# EAGLE board Copy of DCS Project Final (EAGLE 9.7.0)

Size 443.7 x 245.09 mm. Coordinates in mm from the lower left corner, seen from the top.
Outline: 0,0 443.7,0 443.7,245.09 0,245.09 0,0
Copper layers (1*16): Top 0.035mm / dielectric 1.5mm / Bottom 0.035mm
Design rules "default": minimum track width 6mil, minimum drill 0.35mm, track to track 6mil, track to pad 6mil, pad to pad 6mil, via to via 6mil, smd to smd 6mil, copper to edge 40mil, drill to drill 6mil, minimum pad ring 10mil, minimum via ring 8mil, stop-mask expansion 4mil, vias tented up to drill 0mil, thermal gap 10mil

## Footprints (pad centres in the part's own frame; a part is rotated, then mirrored left to right if it is on the bottom)
7SEG-13 = drill 0.813 long: 1 -5.08,-7.62; 2 -2.54,-7.62; 3 0,-7.62; 4 2.54,-7.62; 5 5.08,-7.62; 6 5.08,7.62; 7 2.54,7.62; 8 0,7.62; 9 -2.54,7.62; 10 -5.08,7.62
BATTERY-GENERIC = drill 1.118 pad 3.15 octagon: + 2.54,0; - -2.54,0
PIEZO = drill 1 pad 1.6: 1 -3.5,0; 2 3.5,0
RESAD1016W63L850D250B = drill 0.83 pad 1.43: 1 -5.08,0; 2 5.08,0
78F01T = drill 0.8: 1 -1.27,-3.81; 2 1.27,-3.81; 3 1.27,3.81; 4 -1.27,3.81
DIP762W53P254L1969H508Q14B = drill 0.743 pad 1.343: 1 -3.81,7.62; 2 -3.81,5.08; 3 -3.81,2.54; 4 -3.81,0; 5 -3.81,-2.54; 6 -3.81,-5.08; 7 -3.81,-7.62; 8 3.81,-7.62; 9 3.81,-5.08; 10 3.81,-2.54; 11 3.81,0; 12 3.81,2.54; 13 3.81,5.08; 14 3.81,7.62
DIP762W53P254L1969H508Q16B = drill 0.743 pad 1.343: 1 -3.81,8.89; 2 -3.81,6.35; 3 -3.81,3.81; 4 -3.81,1.27; 5 -3.81,-1.27; 6 -3.81,-3.81; 7 -3.81,-6.35; 8 -3.81,-8.89; 9 3.81,-8.89; 10 3.81,-6.35; 11 3.81,-3.81; 12 3.81,-1.27; 13 3.81,1.27; 14 3.81,3.81; 15 3.81,6.35; 16 3.81,8.89

## Placement (x,y rotation side)
DIGIT2  7SEG-CK  [7SEG-13]  226.55,14.1 0 top
FUNC1  FUNCTION-GENERATOR  [BATTERY-GENERIC]  263.32,132.14 180 top
FUNC3  FUNCTION-GENERATOR  [BATTERY-GENERIC]  58.27,228.66 180 top
FUNC4  FUNCTION-GENERATOR  [BATTERY-GENERIC]  108.98,229.36 180 top
FUNC5  FUNCTION-GENERATOR  [BATTERY-GENERIC]  8.26,198.1 180 top
FUNC6  FUNCTION-GENERATOR  [BATTERY-GENERIC]  8.49,165.22 180 top
FUNC7  FUNCTION-GENERATOR  [BATTERY-GENERIC]  348.62,229.59 180 top
FUNC8  FUNCTION-GENERATOR  [BATTERY-GENERIC]  401.18,230.28 180 top
FUNC9  FUNCTION-GENERATOR  [BATTERY-GENERIC]  435.45,195.32 180 top
FUNC10  FUNCTION-GENERATOR  [BATTERY-GENERIC]  435.45,161.28 180 top
P1  BATTERYGENERIC  [BATTERY-GENERIC]  219.44,137.55 180 top
PIEZO1  PIEZO  [PIEZO]  227.32,231.51 0 top
R1  1k  [RESAD1016W63L850D250B]  364.56,98.22 90 top
R2  1k  [RESAD1016W63L850D250B]  369.64,98.22 90 top
R3  1k  [RESAD1016W63L850D250B]  374.72,98.22 90 top
R4  1k  [RESAD1016W63L850D250B]  359.48,98.22 90 top
R8  1k  [RESAD1016W63L850D250B]  233.67,226.43 90 top
R16  1k  [RESAD1016W63L850D250B]  218.62,40.98 90 top
R17  1k  [RESAD1016W63L850D250B]  221.16,40.98 90 top
R18  1k  [RESAD1016W63L850D250B]  223.7,40.98 90 top
R19  1k  [RESAD1016W63L850D250B]  226.24,40.98 90 top
R20  1k  [RESAD1016W63L850D250B]  228.78,40.98 90 top
R21  1k  [RESAD1016W63L850D250B]  231.32,40.98 90 top
R22  1k  [RESAD1016W63L850D250B]  233.86,40.98 90 top
SW1  DPST78F01T  [78F01T]  245.1,197.22 0 top
U1  74HC73_PDIP  [DIP762W53P254L1969H508Q14B]  301.06,99.49 90 top
U2  74HC73_PDIP  [DIP762W53P254L1969H508Q14B]  323.92,99.49 90 top
U3  74HC08_PDIP  [DIP762W53P254L1969H508Q14B]  275.66,99.49 90 top
U4  74HC04_PDIP  [DIP762W53P254L1969H508Q14B]  255.34,99.49 90 top
U10  CD4511_PDIP  [DIP762W53P254L1969H508Q16B]  227.51,52.41 270 top
U12  74HC74_PDIP  [DIP762W53P254L1969H508Q14B]  157.47,197.22 90 top
U13  74HC74_PDIP  [DIP762W53P254L1969H508Q14B]  177.79,197.22 90 top
U14  74HC74_PDIP  [DIP762W53P254L1969H508Q14B]  198.11,197.22 90 top
U15  74HC74_PDIP  [DIP762W53P254L1969H508Q14B]  218.43,197.22 90 top
U16  74HC08_PDIP  [DIP762W53P254L1969H508Q14B]  54.25,198.68 90 top
U17  74HC32_PDIP  [DIP762W53P254L1969H508Q14B]  74.57,198.68 90 top
U18  74HC08_PDIP  [DIP762W53P254L1969H508Q14B]  343.54,197.8 90 top
U19  74HC32_PDIP  [DIP762W53P254L1969H508Q14B]  363.86,197.8 90 top

## Library data of the parts
DIGIT2 = Tinkercad; CATEGORY: Opto-Electronic; SUB-CATEGORY: Display; TYPE: 7-Segment
FUNC1 FUNC3-FUNC10 P1 PIEZO1 R1-R4 R8 R16-R22 SW1 U1-U4 U10 U12-U19 = Tinkercad

## Nets
DIGIT2_A: DIGIT2.7 R20.1
DIGIT2_B: DIGIT2.6 R19.1
DIGIT2_C: DIGIT2.4 R18.1
DIGIT2_D: DIGIT2.2 R17.1
DIGIT2_E: DIGIT2.1 R16.1
DIGIT2_F: DIGIT2.9 R22.1
DIGIT2_G: DIGIT2.10 R21.1
FUNC1+: FUNC1.+ U1.1 U12.3 U12.11 U13.3 U13.11 U14.3 U14.11 U15.3 U15.11
FUNC3+: FUNC3.+ U16.12
FUNC4+: FUNC4.+ U16.9
FUNC5+: FUNC5.+ U16.4
FUNC6+: FUNC6.+ U16.1
FUNC7+: FUNC7.+ U18.12
FUNC8+: FUNC8.+ U18.9
FUNC9+: FUNC9.+ U18.4
FUNC10+: FUNC10.+ U18.1
FUNC10-: DIGIT2.8 FUNC1.- FUNC3.- FUNC4.- FUNC5.- FUNC6.- FUNC7.- FUNC8.- FUNC9.- FUNC10.- P1.- R8.1 U1.11 U2.11 U3.7 U4.7 U10.5 U10.8 U12.7 U13.7 U14.7 U15.7 U16.7 U17.7 U18.7 U19.7
P1+: P1.+ SW1.1 SW1.2 U1.3 U1.4 U1.7 U1.10 U1.14 U2.3 U2.4 U2.7 U2.10 U2.14 U3.12 U3.14 U4.14 U10.3 U10.4 U10.16 U12.1 U12.10 U12.14 U13.4 U13.10 U13.14 U14.4 U14.10 U14.14 U15.4 U15.10 U15.14 U16.14 U17.14 U18.14 U19.14
PIEZO1_2: PIEZO1.2 R8.2
U1_2Q: R2.2 U1.9 U2.1 U3.2 U10.1
U2_R1: U1.2 U1.6 U2.2 U2.6 U3.11 U4.9
U3_1Y: U3.3 U3.4
U3_3A: U3.6 U3.9
U3_3Y: U3.8 U4.11
U4_1Y: U3.5 U4.2
U4_5Y: U3.13 U4.10
U4_6Y: U3.10 U4.12
U10_A: R20.2 U10.13
U10_B: R19.2 U10.12
U10_C: R18.2 U10.11
U10_D: R17.2 U10.10
U10_E: R16.2 U10.9
U10_F: R22.2 U10.15
U10_G: R21.2 U10.14
U10_IA: R3.2 U1.5 U1.12 U4.13 U10.7
U10_IC: R1.2 U2.5 U2.12 U4.1 U10.2
U10_ID: R4.2 U2.9 U3.1 U10.6
U12_1Q: U12.5 U12.12 U16.2
U12_2Q: U12.9 U13.2 U16.5
U12_CLR2: SW1.4 U12.13 U13.13 U14.13 U15.13
U13_2Q: U13.9 U14.2 U16.13
U14_1Q: U14.5 U14.12 U18.2
U14_2Q: U14.9 U15.2 U18.5
U15_1Q: U15.5 U15.12 U18.13
U15_2Q: U12.2 U15.9 U18.10
U15_CLR1: SW1.3 U12.4 U13.1 U14.1 U15.1
U16_1Y: U16.3 U17.1
U16_2Y: U16.6 U17.2
U16_3B: U13.5 U13.12 U16.10
U16_3Y: U16.8 U17.5
U16_4Y: U16.11 U17.10
U17_1Y: U17.3 U17.4
U17_2Y: U17.6 U17.9
U17_3Y: U17.8 U17.13
U17_4Y: PIEZO1.1 U17.11
U18_1Y: U18.3 U19.1
U18_2Y: U18.6 U19.2
U18_3Y: U18.8 U19.10
U18_4Y: U18.11 U19.5
U19_1Y: U19.3 U19.4
U19_2Y: U19.6 U19.9
U19_3Y: U17.12 U19.8

## Tracks (layer width: path | path; a pad name or v marks a point on that pad's centre or on a via)
DIGIT2_A  (1 unrouted)
DIGIT2_B  (1 unrouted)
DIGIT2_C  (1 unrouted)
DIGIT2_D  (1 unrouted)
DIGIT2_E  (1 unrouted)
DIGIT2_F  (1 unrouted)
DIGIT2_G  (1 unrouted)
FUNC1+  (9 unrouted)
FUNC3+  (1 unrouted)
FUNC4+  (1 unrouted)
FUNC5+  (1 unrouted)
FUNC6+  (1 unrouted)
FUNC7+  (1 unrouted)
FUNC8+  (1 unrouted)
FUNC9+  (1 unrouted)
FUNC10+  (1 unrouted)
FUNC10-  (25 unrouted)
P1+  (34 unrouted)
PIEZO1_2  (1 unrouted)
U1_2Q  (4 unrouted)
U2_R1  (5 unrouted)
U3_1Y  (1 unrouted)
U3_3A  (1 unrouted)
U3_3Y  (1 unrouted)
U4_1Y  (1 unrouted)
U4_5Y  (1 unrouted)
U4_6Y  (1 unrouted)
U10_A  (1 unrouted)
U10_B  (1 unrouted)
U10_C  (1 unrouted)
U10_D  (1 unrouted)
U10_E  (1 unrouted)
U10_F  (1 unrouted)
U10_G  (1 unrouted)
U10_IA  (4 unrouted)
U10_IC  (4 unrouted)
U10_ID  (3 unrouted)
U12_1Q  (2 unrouted)
U12_2Q  (2 unrouted)
U12_CLR2  (4 unrouted)
U13_2Q  (2 unrouted)
U14_1Q  (2 unrouted)
U14_2Q  (2 unrouted)
U15_1Q  (2 unrouted)
U15_2Q  (2 unrouted)
U15_CLR1  (4 unrouted)
U16_1Y  (1 unrouted)
U16_2Y  (1 unrouted)
U16_3B  (2 unrouted)
U16_3Y  (1 unrouted)
U16_4Y  (1 unrouted)
U17_1Y  (1 unrouted)
U17_2Y  (1 unrouted)
U17_3Y  (1 unrouted)
U17_4Y  (1 unrouted)
U18_1Y  (1 unrouted)
U18_2Y  (1 unrouted)
U18_3Y  (1 unrouted)
U18_4Y  (1 unrouted)
U19_1Y  (1 unrouted)
U19_2Y  (1 unrouted)
U19_3Y  (1 unrouted)